# Altium PCB ECG_Regulator.PcbDoc
Units mm, origin at the board's own origin, x right, y up, seen from the top; angles counter-clockwise.
Board outline 103 x 40 mm, 2 copper layers (Top Layer, Bottom Layer); 10 components, 8 nets, 31 pads, 0 vias.
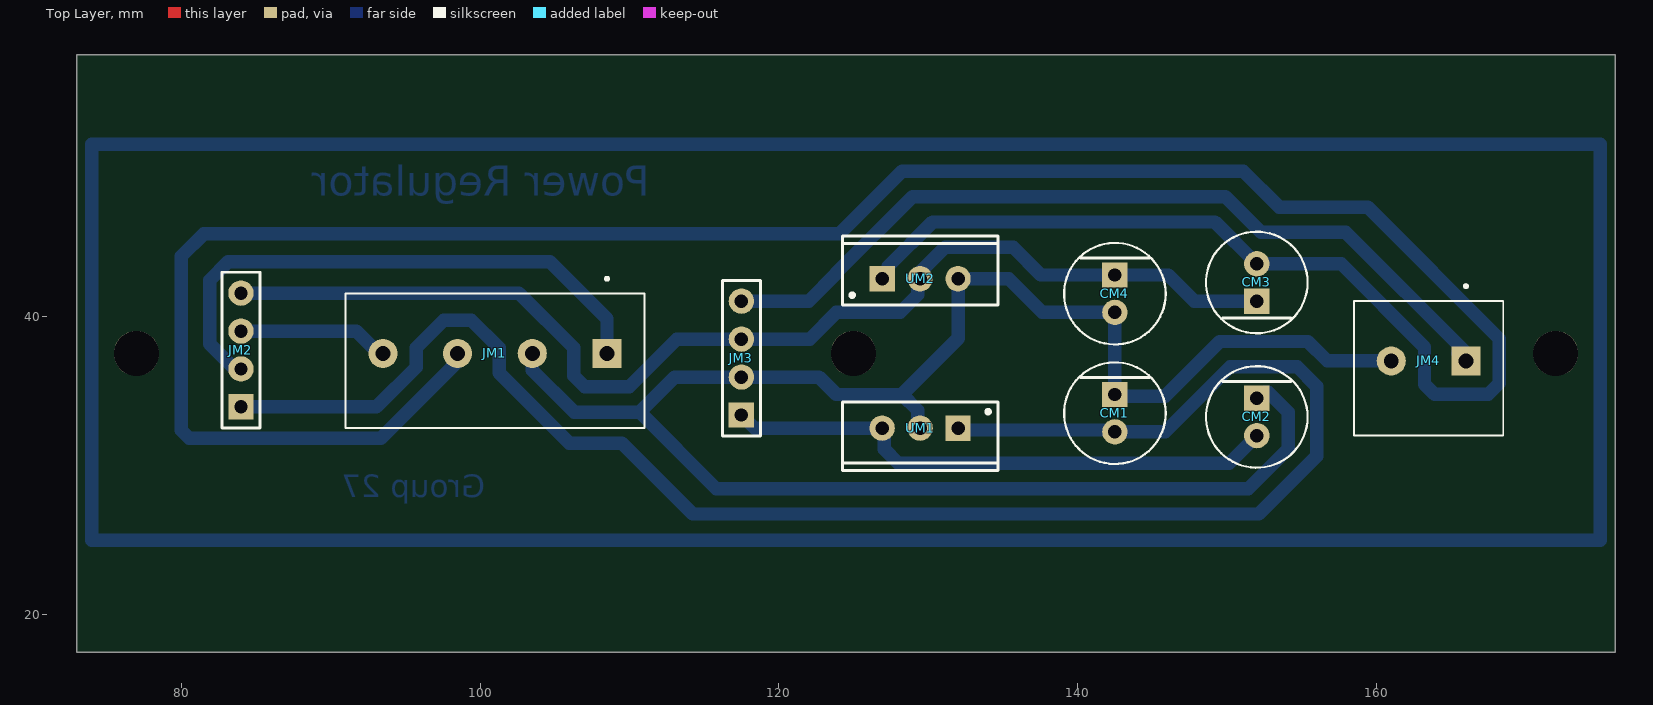
[diagram p0: Top Layer view]
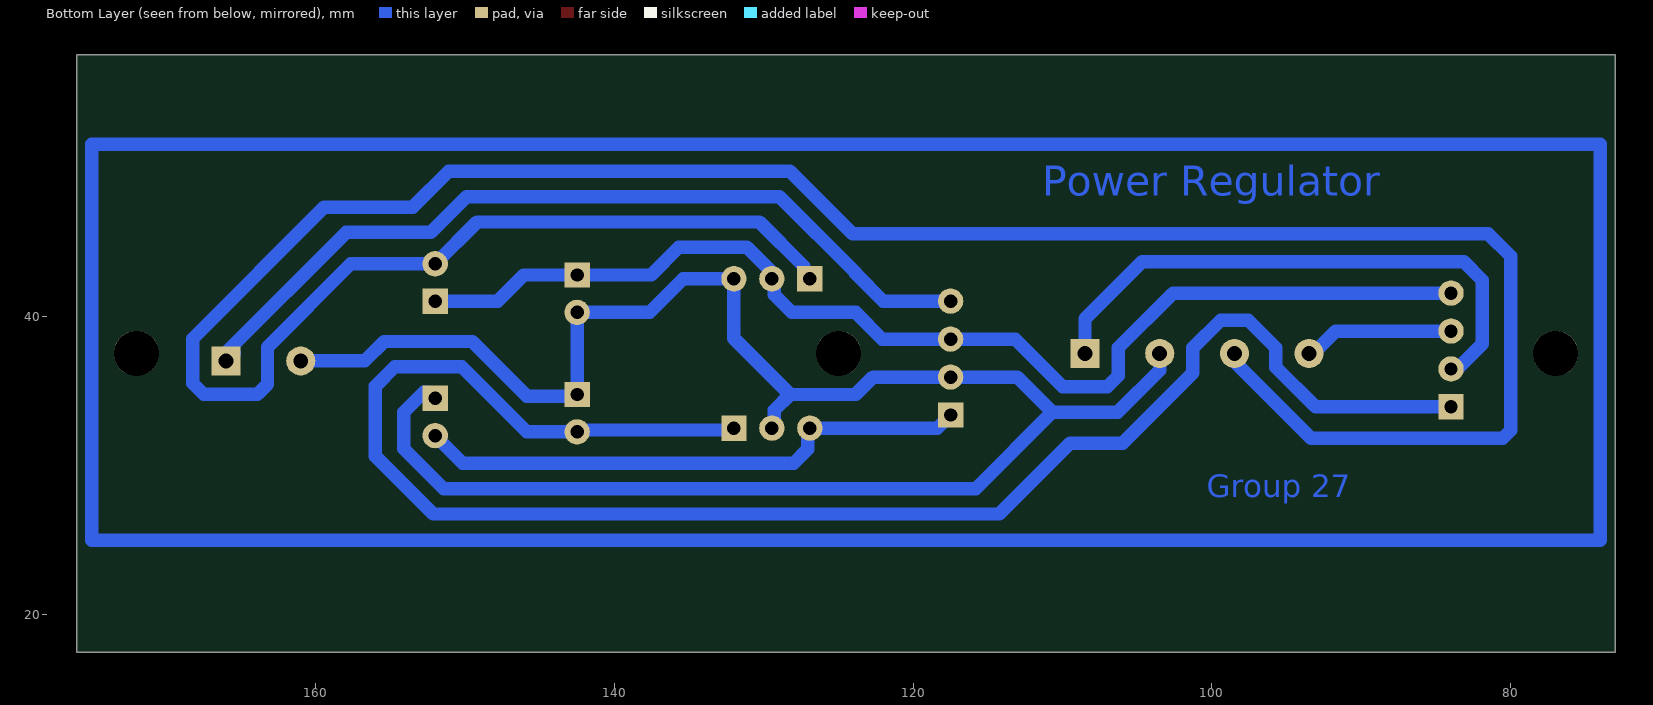
[diagram p1: Bottom Layer view, seen from below]
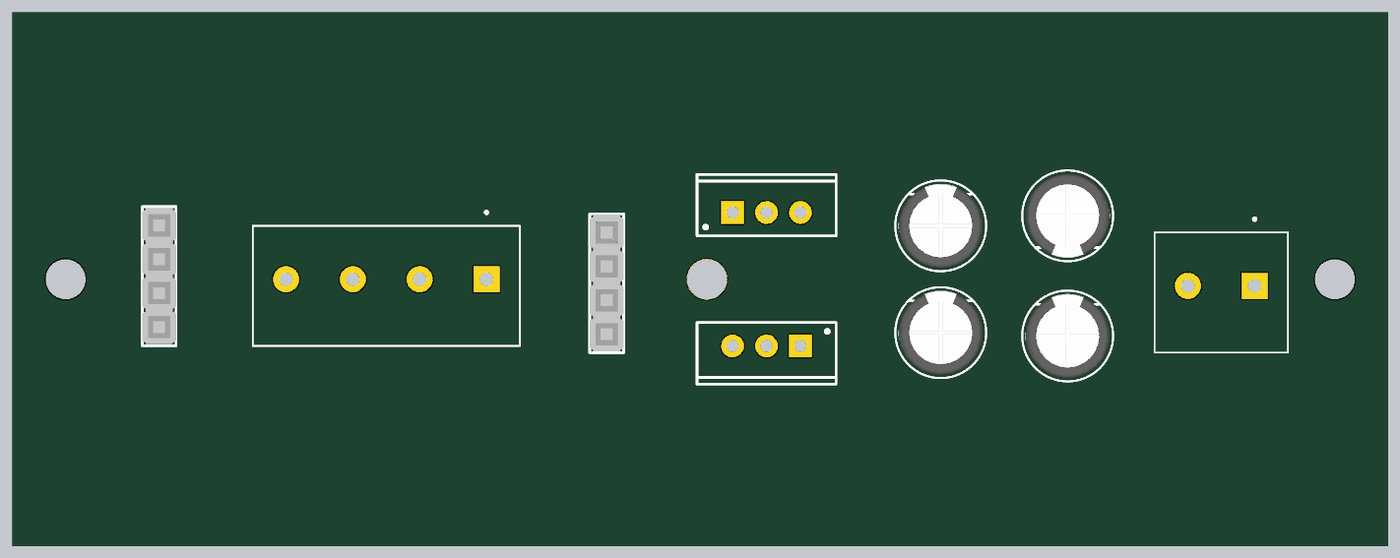
[diagram p2: 3D render of the assembled board from above, using the file's embedded part models]

## Layer stack, top to bottom
Top Solder: solder mask 0.0102, Solder Resist, Dk 3.5
Top Layer: signal copper 0.0356
Dielectric 1: dielectric 0.32, FR-4, Dk 4.8
Bottom Layer: signal copper 0.0356
Bottom Solder: solder mask 0.0102, Solder Resist, Dk 3.5

## Board outline
73,17.5 176,17.5 176,57.5 73,57.5

## Design rules (kind name [scope] priority, off if disabled: settings)
Clearance [All] p1: gap=0.8 ignorepadtopadclearanceinfootprint=FALSE
PolygonConnect [All] p1: connectstyle=Relief reliefconductorwidth=0.254 reliefentries=4 polygonreliefangle="90 Angle" airgapwidth=0.254
RoutingLayers [All] p1: top layer_v5=FALSE bottom layer_v5=TRUE
RoutingVias [All] p1: holewidth=0.711 width=1.27 viastyle="Through Hole" minholewidth=0.711 minwidth=1.27 maxholewidth=0.711 maxwidth=1.27
SolderMaskExpansion [All] p1: expansion=0.102 istentingtop=FALSE
Width [All] p1: maxlimit=0.9 minlimit=0.9 preferedwidth=0.9
29 further rules are at their usual default settings.

## Classes and differential pairs
component class ECG_Regulator: CM1 CM4 JM2 UM2

## Components (designator, comment, footprint, x,y, rotation, side; value= is the part's Value field where it differs from the comment)
CM1 "10uF" FP-RAD-TH-D_6_3_0_5-L_11-MFG 142.5,33.5 r270 top
CM2 "1uF" FP-RAD-TH-D_6_3_0_5-L_11-MFG 152,33.25 r270 top
CM3 "10uF" FP-RAD-TH-D_6_3_0_5-L_11-MFG 152,42.25 r90 top
CM4 "1uF" FP-RAD-TH-D_6_3_0_5-L_11-MFG 142.5,41.5 r270 top
JM1 "BATTERY" CUI_TB001-500-04BE 108.5,37.5 r180 top
JM2 "SWITCH" SMTC-SLW-104-01-X-S 84,33.92 r90 top
JM3 "MAIN" SMTC-SLW-104-01-X-S 117.5,33.38 r90 top
JM4 "OSCILLOSCOPE" CUI_TB001-500-02BE 166,37 r180 top
UM1 "LM7806CT" TO220 129.46,32.5 r180 top
UM2 "LM7806CT" TO220 129.46,42.5 r0 top

## Footprints (in the part's own frame and the unit in brackets; to place one, negate y for a bottom-side part, rotate by r counter-clockwise, add the part's x,y. Pads: shape width x height; smd on the part's side, far side on the other; paste and mask are expansions set on the pad)
CUI_TB001-500-02BE [mm]
  rect 1.95x1.95 hole 1: 1(0,0)
  round 1.95 hole 1: 2(5,0)
  silkscreen extent -2.5,-5.1 7.5,5
CUI_TB001-500-04BE [mm]
  rect 1.95x1.95 hole 1: 1(0,0)
  round 1.95 hole 1: 2(5,0) 3(10,0) 4(15,0)
  silkscreen extent -2.5,-5.1 17.5,5
FP-RAD-TH-D_6_3_0_5-L_11-MFG [mm]
  rect 1.7x1.7 hole 0.9 paste-1000 mask+0: 1(-1.25,0)
  round 1.7 hole 0.9 paste-1000 mask+0: 2(1.25,0)
  silkscreen extent -3.4,-3.4 3.4,3.4, body extent -3.5,-3.5 3.5,3.5, height 0.25
SMTC-SLW-104-01-X-S [mm] "Low Profile Socket Strip, 1x4 Pins, Vertical, 2.54mm Pitch, Female"
  rect 1.7x1.7 hole 0.9: 1(0,0)
  round 1.7 hole 0.9: 2(2.54,0) 3(5.08,0) 4(7.62,0)
  silkscreen extent -1.39,-1.27 9.02,1.27, body extent -1.27,-1.27 8.89,1.27, height 4.57
TO220 [mm] "TO, Thru-Hole, Vertical, Heatsink Mounted; 3 In-Line Leads; Pitch 2.54 mm"
  rect 1.7x1.7 hole 0.9: 1(-2.54,0)
  round 1.7 hole 0.9: 2(0,0) 3(2.54,0)
  silkscreen extent -5.2,-1.75 5.2,2.85, body extent -5.25,-1.8 5.25,2.9, height 19.7

## Part data
CM1 CM2 CM3 CM4: library part CMP-001-00083-1, "Cap Aluminum Lytic 100uF 25V 20% (6.3 X 11.2mm) Radial 2.5mm 130mA 1000h 105°C Ammo Pack"
JM1: library part TB001-500-04BE, Package=None, Availability=Unavailable, MF="{'manufacturer': u'CUI Devices'}", MP=TB001-500-04BE, Price=None
JM2 JM3: library part CMP-1023-00130-1, "Low Profile Socket Strips, Through-hole, Vertical, -55 to 125 degC, 2.54 mm Pitch, 4-Pin, Female, RoHS", Manufacturer=Samtec, PartNumber=SLW-104-01-G-S, Temperature Range="-55 to 125 degC", ComponentLink1Description="Manufacturer URL", ComponentLink1URL=http://www.samtec.com, ComponentLink2Description=Datasheet, ComponentLink2URL=http://www.samtec.com/documents/webfiles/pdf/SLW.PDF, ComponentLink3Description="Package Specification", ComponentLink3URL=http://www.samtec.com/documents/webfiles/cpdf/SLW-1XX-01-X-X-MKT.pdf, DatasheetVersion=F-214, Mounting Technology=Through-hole, Orientation=Vertical, PackageDescription="Low Profile Socket Strip", PackageReference=SLW-104-01-X-S, PackageVersion="X, 9/1987", Pitch="2.54 mm", RoHS=True
JM4: library part TB001-500-02BE, Package=None, Availability=Unavailable, MF="{'manufacturer': u'CUI Devices'}", MP=TB001-500-02BE, Price=None
UM1 UM2: library part CMP-0244-00495-1, "Positive Voltage Regulator, 6V, 3-Pin TO-220", ComponentLink1Description="Manufacturer URL", ComponentLink1URL=http://www.st.com, ComponentLink2Description=Datasheet, ComponentLink2URL=http://www.st.com/internet/com/TECHNICAL_RESOURCES/TECHNICAL_LITERATURE/DATASHEET/CD00000444.pdf, ComponentLink3Description="Package Specification", ComponentLink3URL=http://www.st.com/internet/com/TECHNICAL_RESOURCES/TECHNICAL_LITERATURE/PACKAGE_INFORMATION/CD00004649.pdf, DatasheetVersion=16/11/2011, PackageDescription="TO, Thru-Hole, Vertical, Heatsink Mounted; 3 In-Line Leads; Pitch 2.54 mm", PackageReference=TO220, PackageVersion=ver3.0

## Free pads (board coordinates)
  round 3 hole 3 unplated: 17(77,37.5) 18(172,37.5)
  round 3 hole 3: 19(125,37.5)

## Nets (pads, with @x,y where several pads share a name; then routed paths per layer and width w, separated by ;. In a path a pad name is that pad's centre, name@x,y a point inside that pad or via, vN(x,y) a via of type N, cw(c..) or ccw(c..) an arc to the next point about the centre after c; other vN are vias at no path point)
+6V(MAIN): CM2.2 JM3.1 UM1.3 | length 37.3
  Bottom Layer w0.9: JM3.1 118.38,32.5 UM1.3 127.073,32.347 127.073,31.077 128,30.15 150.15,30.15 CM2.2
-6V(MAIN): CM3.1 CM4.1 JM2.4 JM3.3 UM2.2 | length 77.9
  Bottom Layer w0.9: JM2.4 102.607,41.54 106.275,37.872 106.275,36.007 107.007,35.275 109.993,35.275 113.178,38.46 JM3.3 122.071,38.46 123.861,40.25 128.138,40.25 129.307,41.419 129.307,42.347 UM2.2 UM2.2@129.46,42.716 ; UM2.2@129.245,42.715 131.13,44.6 135.69,44.6 137.54,42.75 CM4.1 146.075,42.75 147.825,41 CM3.1
B1(+V): JM1.1 JM2.2 | length 38.1
  Bottom Layer w0.9: JM2.2@83.765,36.265 81.9,38.13 81.9,42.41 83.13,43.64 104.685,43.64 108.5,39.825 JM1.1 ; JM2.2@83.784,36.46 JM2.2
B2(+V): CM3.2 JM1.3 UM2.1 | length 181
  Bottom Layer w0.9: JM1.3@98.5,37.216 JM1.3 ; JM1.3@98.775,37.225 93.371,31.82 80.527,31.82 80,32.347 80,44 81.5,45.5 124.048,45.5 128.248,49.7 151.1,49.7 153.5,47.3 159.418,47.3 168.225,38.493 168.225,35.507 167.493,34.775 163.897,34.775 163.225,35.447 163.225,37.922 157.647,43.5 CM3.2 149.2,46.3 130.29,46.3 127.32,43.33 127.32,42.9 UM2.1
ECG_OUT(MAIN): JM3.4 JM4.1 | length 56.5
  Bottom Layer w0.9: JM3.4 122,41 123.88,42.88 123.88,42.927 128.952,48 149.904,48 152.304,45.6 157.951,45.6 JM4.1@166.013,37.538 ; JM4.1@165.452,37.525 165.475,37.525 JM4.1
GND(MAIN): CM1.1 CM2.1 CM4.2 JM1.2 JM3.2 JM4.2 UM1.2 UM2.3 | length 129.6
  Bottom Layer w0.9: JM1.2@103.5,37.216 JM1.2 103.5,36.378 106.303,33.575 110.697,33.575 ; UM1.2 129.307,32.653 129.307,33.693 128.25,34.75 ; CM2.1@152.5,34.9 152.773,34.9 154.1,33.573 154.1,31.13 151.42,28.45 115.822,28.45 110.697,33.575 ; JM4.2 156.704,37 155.404,38.3 149.513,38.3 145.856,34.644 142.606,34.644 CM1.1 CM4.2 137.636,40.25 135.386,42.5 UM2.3 132,38.5 128.25,34.75 ; 110.697,33.575 113.042,35.92 JM3.2 122.691,35.92 123.861,34.75 128.25,34.75
NetCM1_2: CM1.2 JM2.1 UM1.1 | length 114.2
  Bottom Layer w0.9: JM2.1 93.067,33.92 95.725,36.578 95.725,37.872 97.578,39.725 99.422,39.725 101.275,37.872 101.275,36.199 105.974,31.5 109.5,31.5 114.25,26.75 152.124,26.75 156,30.626 156,35.3 154.7,36.6 150.217,36.6 145.867,32.25 CM1.2 142.375,32.375 132.125,32.375 UM1.1
NetJM1_4: JM1.4 JM2.3 | length 10.1
  Bottom Layer w0.9: JM2.3 91.716,39 93.216,37.5 JM1.4
copper on no net: | length 255
  Bottom Layer w0.9: 74,25 74,51.5 175,51.5 175,25 74,25

## Other copper
Bottom Layer:
  text "Power Regulator" at 111.355,48.067 h2
  text "Group 27" at 100.34,27.889 h1.52